# EAGLE board SatNOGSBoard (EAGLE 6.4)
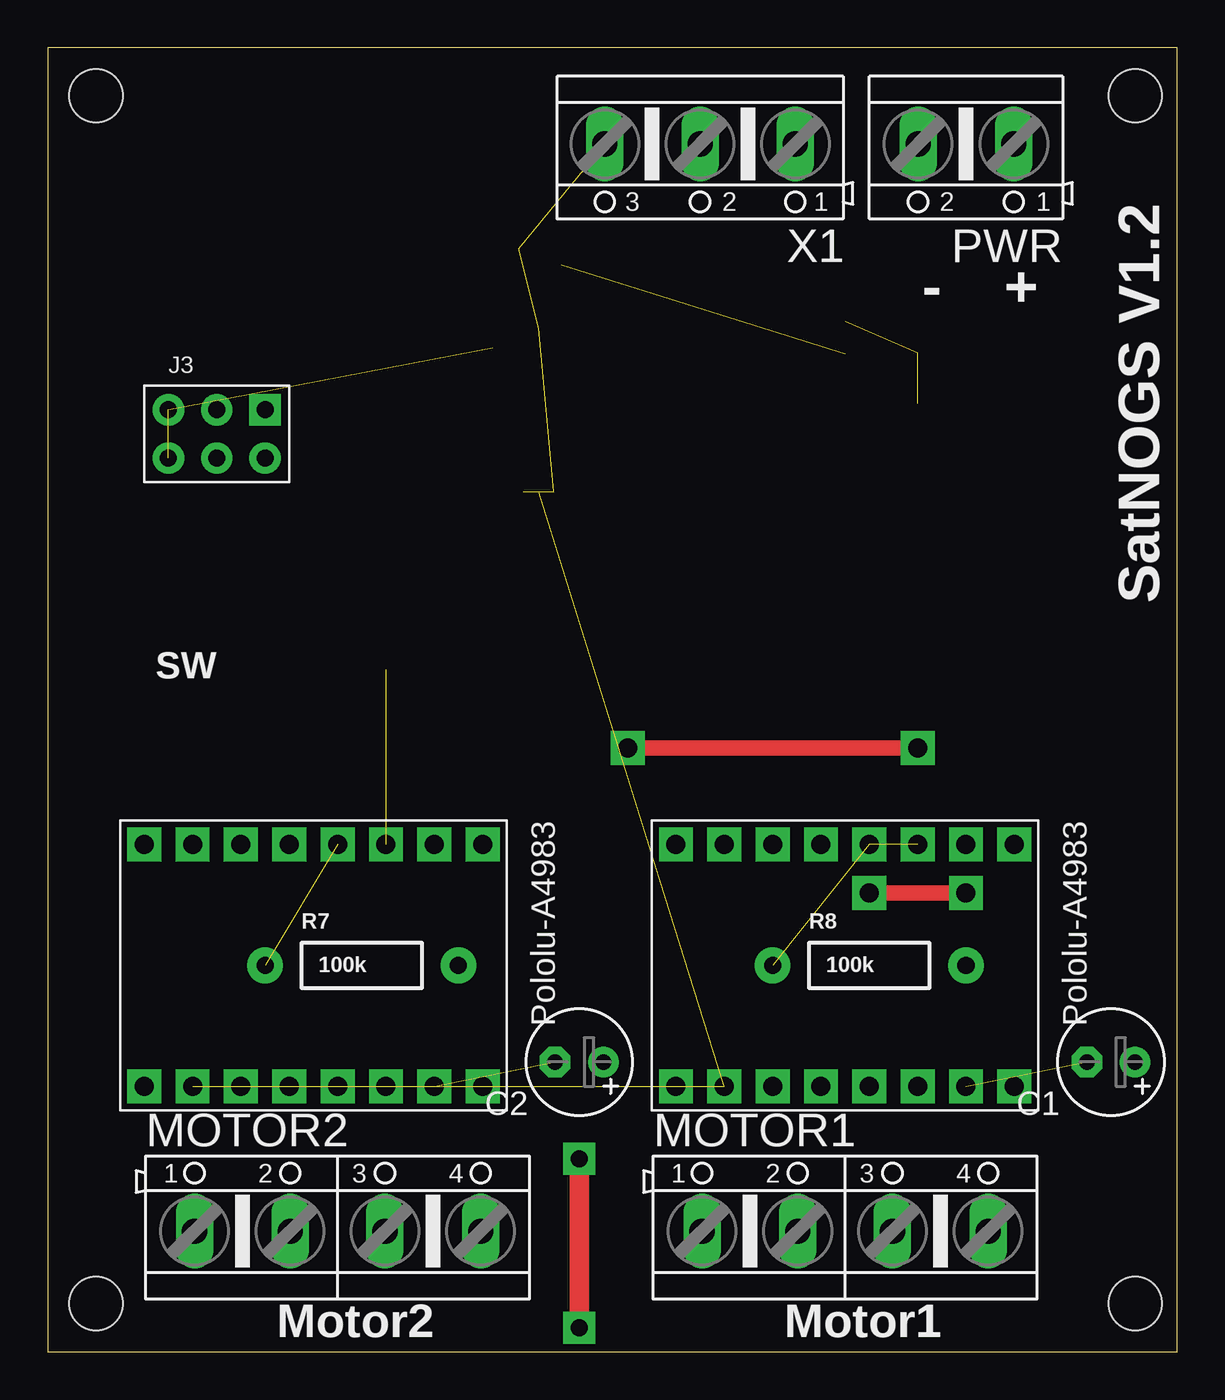
[diagram p0: board, top side]
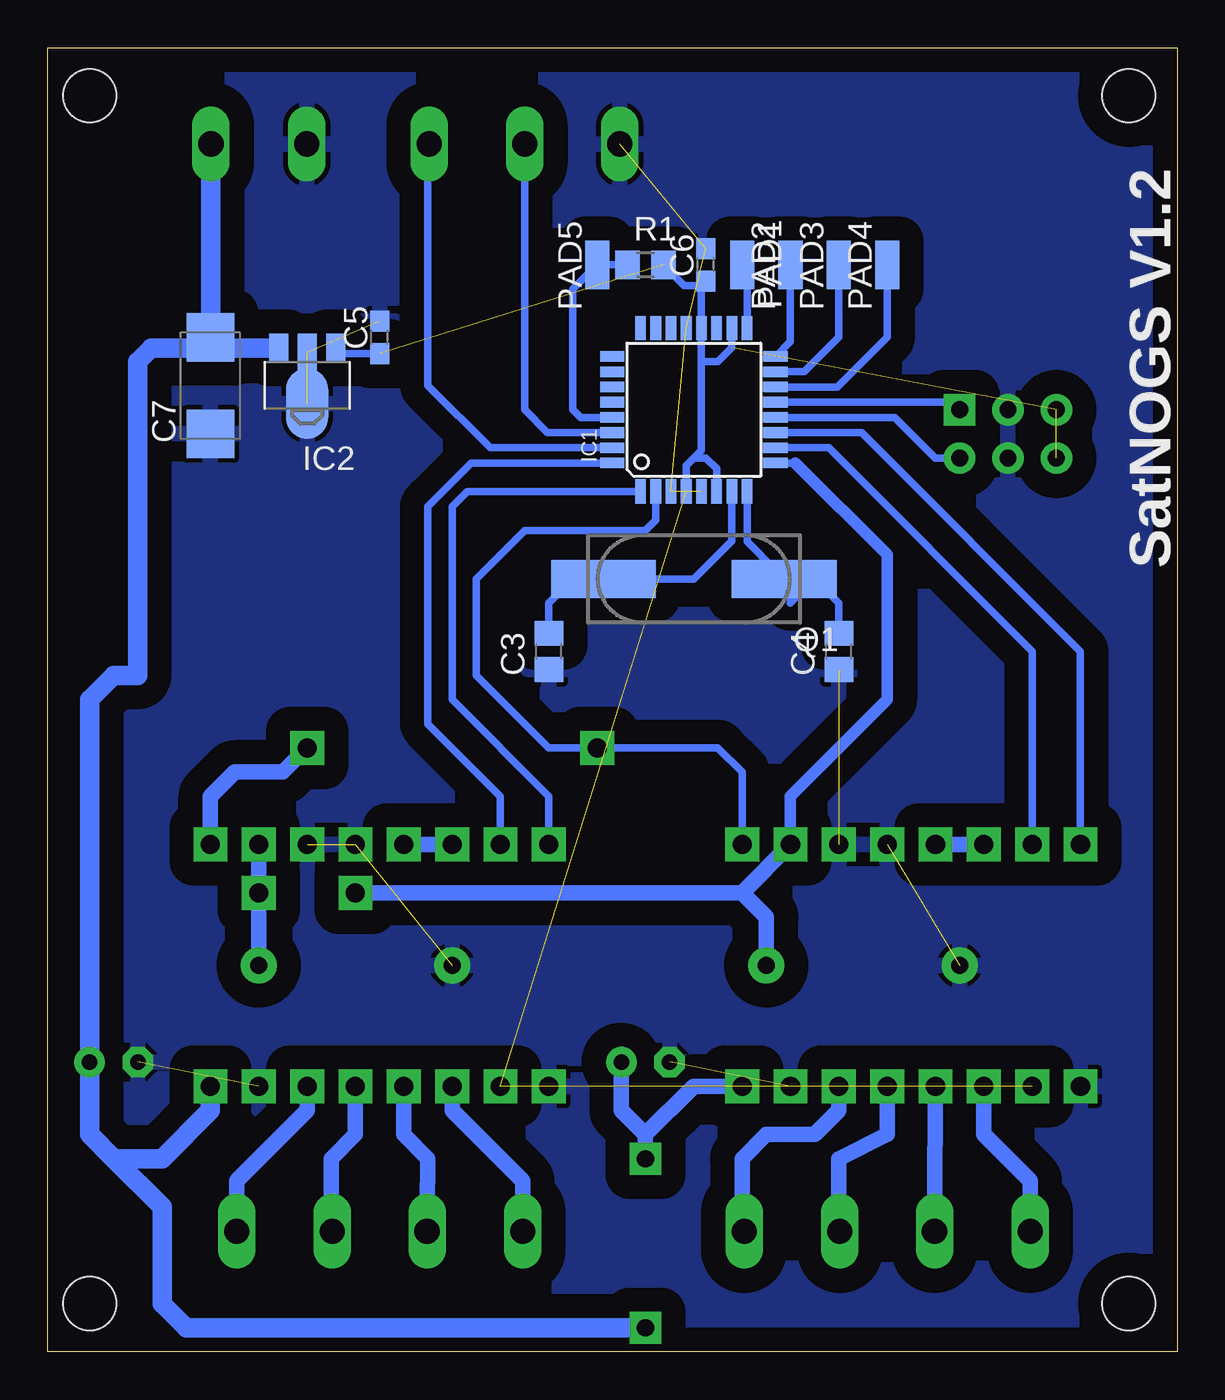
[diagram p1: board, bottom side, seen from below]

Size 59.36 x 68.57 mm. Coordinates in mm from the lower left corner, seen from the top.
Outline: 0,0 59.36,0 59.36,68.57 0,68.57 0,0
Copper layers (1*16): Top 0.035mm / dielectric 1.5mm / Bottom 0.035mm
Design rules "SparkFun": minimum track width 8mil, minimum drill 20mil, track to track 8mil, track to pad 8mil, pad to pad 8mil, via to via 8mil, smd to smd 8mil, copper to edge 8mil, drill to drill 8mil, minimum pad ring 12mil, minimum via ring 10mil, stop-mask expansion 4mil, vias tented up to drill 20mil, thermal gap 10mil
Holes 2.8 mm at 2.54,66.04 57.15,66.04 2.54,2.54 57.15,2.54

## Footprints (pad centres in the part's own frame; a part is rotated, then mirrored left to right if it is on the bottom)
E2,5-6 = drill 0.813 pad 1.6: + -1.27,0 | drill 0.813 pad 1.6 octagon: - 1.27,0
C0805 = smd 1.3 x 1.5: 1 -0.95,0; 2 0.95,0
C0603 = smd 1.1 x 1: 1 -0.85,0; 2 0.85,0
C/6032-28R = smd 2.55 x 2.5: + 2.525,0; - -2.525,0
POLOLU-A4983 = drill 1 pad 1.778 square: 1 -6.35,8.89; 2 -6.35,6.35; 3 -6.35,3.81; 4 -6.35,1.27; 5 -6.35,-1.27; 6 -6.35,-3.81; 7 -6.35,-6.35; 8 -6.35,-8.89; 9 6.35,-8.89; 10 6.35,-6.35; 11 6.35,-3.81; 12 6.35,-1.27; 13 6.35,1.27; 14 6.35,3.81; 15 6.35,6.35; 16 6.35,8.89
TQFP32-08 = smd 1.27 x 0.559: 1 -4.293,2.8; 2 -4.293,2; 3 -4.293,1.2; 4 -4.293,0.4; 5 -4.293,-0.4; 6 -4.293,-1.2; 7 -4.293,-2; 8 -4.293,-2.8; 17 4.293,-2.8; 18 4.293,-2; 19 4.293,-1.2; 20 4.293,-0.4; 21 4.293,0.4; 22 4.293,1.2; 23 4.293,2; 24 4.293,2.8 | smd 0.559 x 1.27: 9 -2.8,-4.293; 10 -2,-4.293; 11 -1.2,-4.293; 12 -0.4,-4.293; 13 0.4,-4.293; 14 1.2,-4.293; 15 2,-4.293; 16 2.8,-4.293; 25 2.8,4.293; 26 2,4.293; 27 1.2,4.293; 28 0.4,4.293; 29 -0.4,4.293; 30 -1.2,4.293; 31 -2,4.293; 32 -2.8,4.293
SOT89 = smd 1 x 1.5: 1 -1.499,-1.981; 3 1.499,-1.981 | smd 1 x 2: 2 0,-1.727 | smd 2.2 x 3.7: 2@1 0,0.94
2X3P-2.54-65/35MIL = drill 0.889 pad 1.651 square: 1 -1.27,2.54 | drill 0.889 pad 1.651: 2 -1.27,0; 3 -1.27,-2.54; 4 1.27,-2.54; 5 1.27,0; 6 1.27,2.54
AK500/4 = drill 1.321 long: 1 -7.518,0; 2 -2.489,0; 3 2.489,0; 4 7.518,0
SMD1,27-2,54 = smd 1.27 x 2.54: 1 0,0
AK500/2 = drill 1.321 long: 1 -2.515,0; 2 2.515,0
CSM-7X-DU = smd 5.5 x 2: 1 -4.75,0; 2 4.75,0
R0805 = smd 1.3 x 1.5: 1 -0.95,0; 2 0.95,0
AXIAL-0.4 = drill 0.9 pad 1.88: P$1 -5.08,0; P$2 5.08,0
AK500/3 = drill 1.321 long: 1 -5.004,0; 2 0,0; 3 5.004,0

## Placement (x,y rotation side)
C1  100uF  [E2,5-6]  55.88,15.24 180 top
C2  100uF  [E2,5-6]  27.94,15.24 180 top
C3  18p  [C0805]  33.02,36.83 90 bottom
C4  18p  [C0805]  17.78,36.83 90 bottom
C5  100n  [C0603]  41.91,53.34 90 bottom
C6  100n  [C0603]  24.77,57.15 90 bottom
C7  [C/6032-28R]  50.8,50.8 90 bottom
DRIVER1  POLOLU-A4983POLOLU-A4983  [POLOLU-A4983]  41.91,20.32 270 top
DRIVER2  POLOLU-A4983POLOLU-A4983  [POLOLU-A4983]  13.97,20.32 270 top
IC1  MEGA8-AI  [TQFP32-08]  25.4,49.53 90 bottom
IC2  78L05F  [SOT89]  45.72,50.8 180 bottom
J3  4  [2X3P-2.54-65/35MIL]  8.89,48.26 270 top
MOTOR1  2  [AK500/4]  41.91,6.35 0 top
MOTOR2  3  [AK500/4]  15.24,6.35 0 top
PAD1  [SMD1,27-2,54]  22.86,57.15 180 bottom
PAD2  [SMD1,27-2,54]  20.32,57.15 0 bottom
PAD3  [SMD1,27-2,54]  17.78,57.15 0 bottom
PAD4  [SMD1,27-2,54]  15.24,57.15 0 bottom
PAD5  [SMD1,27-2,54]  30.48,57.15 0 bottom
PWR  1  [AK500/2]  48.26,63.5 180 top
Q1  16MHz  [CSM-7X-DU]  25.4,40.64 180 bottom
R1  10k  [R0805]  27.94,57.15 0 bottom
R7  100k  [AXIAL-0.4]  16.51,20.32 0 top
R8  100k  [AXIAL-0.4]  43.18,20.32 0 top
X1  [AK500/3]  34.29,63.5 180 top

## Library data of the parts
C1-C7 R1 = rcl
DRIVER1 DRIVER2 = Pololu-A4983
IC1 = atmel; MPN: ATMEGA8-16AU; OC_FARNELL: 9171371; OC_NEWARK: 73M8863
IC2 = linear
J3 = Connector
MOTOR1 MOTOR2 PWR X1 = con-ptr500; OC_FARNELL: unknown; OC_NEWARK: unknown
PAD1-PAD5 = wirepad
Q1 = crystal; OC_FARNELL: unknown; OC_NEWARK: unknown
R7 R8 = SparkFun-Resistors

## Nets
1-1A: DRIVER1.12 MOTOR1.2
1-1B: DRIVER1.11 MOTOR1.1
1-2A: DRIVER1.13 MOTOR1.3
1-2B: DRIVER1.14 MOTOR1.4
2-1A: DRIVER2.12 MOTOR2.2
2-1B: DRIVER2.11 MOTOR2.1
2-2A: DRIVER2.13 MOTOR2.3
2-2B: DRIVER2.14 MOTOR2.4
+5V: C5.1 C6.1 DRIVER1.10 DRIVER2.10 IC1.4 IC1.6 IC1.18 IC1.20 IC2.1 J3.3 J3.4 R1.2
DIR-1: DRIVER1.8 IC1.1
DIR-2: DRIVER2.8 IC1.11
GND: C1.- C2.- C3.1 C4.1 C5.2 C6.2 C7.- DRIVER1.3 DRIVER1.4 DRIVER1.9 DRIVER1.15 DRIVER2.3 DRIVER2.4 DRIVER2.9 DRIVER2.15 IC1.3 IC1.5 IC1.21 IC2.2 IC2.2@1 J3.2 J3.5 PWR.2 R7.P$1 R8.P$1 X1.3
M_EN: DRIVER1.1 DRIVER2.1 IC1.2
MS1: DRIVER1.2 DRIVER2.2 IC1.9 R7.P$2 R8.P$2
N$1: DRIVER1.5 DRIVER1.6
N$2: DRIVER2.5 DRIVER2.6
N$3: IC1.31 X1.1
N$4: C3.2 IC1.7 Q1.2
N$5: IC1.29 PAD5.1 R1.1
N$6: C4.2 IC1.8 Q1.1
N$7: IC1.30 X1.2
N$8: IC1.14 PAD4.1
N$9: IC1.15 PAD3.1
N$10: IC1.16 PAD2.1
N$11: IC1.17 PAD1.1
STEP-1: DRIVER1.7 IC1.32
STEP-2: DRIVER2.7 IC1.10
SW1: IC1.13 J3.1
SW2: IC1.12 J3.6
VMOTOR: C1.+ C2.+ C7.+ DRIVER1.16 DRIVER2.16 IC2.3 PWR.1

## Tracks (layer width: path | path; a pad name or v marks a point on that pad's centre or on a via)
1-1A
  Bottom 0.813: MOTOR1.2 39.42,8.84 39.37,8.89 39.37,10.16 40.64,11.43 DRIVER1.12
1-1B
  Bottom 0.813: MOTOR1.1 34.39,8.99 38.1,12.7 DRIVER1.11
1-2A
  Bottom 0.813: DRIVER1.13 43.18,11.43 44.45,10.16 44.45,6.4 MOTOR1.3
1-2B
  Bottom 0.813: MOTOR1.4 49.43,8.99 45.72,12.7 DRIVER1.14
2-1A
  Bottom 0.813: MOTOR2.2 12.75,10.21 12.7,11.43 DRIVER2.12
2-1B
  Bottom 0.813: MOTOR2.1 7.72,8.99 10.16,11.43 DRIVER2.11
2-2A
  Bottom 0.813: DRIVER2.13 15.24,11.43 17.78,10.16 17.78,6.4 MOTOR2.3
2-2B
  Bottom 0.813: MOTOR2.4 22.86,6.45 22.86,10.16 21.59,11.43 19.05,11.43 17.78,12.7 DRIVER2.14
+5V  (5 unrouted)
  Bottom 0.406: IC1.4 25.8,46.59 25.4,46.99 | IC1.6 24.2,46.42 24.77,46.99 25.4,46.99 | 25,52.07 IC1.20 25,56.06 | 25,52.07 25,47.39 25.4,46.99 | IC1.18 23.4,52.8 24.13,52.07 25,52.07 | 25,56.06 C6.1 | 25,56.06 25.91,56.06 R1.2 | C5.1 43.93,52.49 IC2.1
DIR-1
  Bottom 0.406: IC1.1 37.31,45.24 38.1,44.45 38.1,34.29 33.02,29.21 DRIVER1.8
DIR-2
  Bottom 0.406: IC1.11 16.58,48.33 5.08,36.83 DRIVER2.8
GND  (12 unrouted)
  pour Bottom (isolate 1.27): 0,68.58 0,0 59.69,0 59.69,68.58
M_EN  (via drill 1 pad 1.78)
  Top 0.813: v45.72,31.75 v30.48,31.75
  Bottom 0.406: IC1.2 27.4,43.72 27.94,43.18 34.29,43.18 36.83,40.64 36.83,35.56 33.02,31.75 v30.48,31.75 24.13,31.75 22.86,30.48 DRIVER2.1
  Bottom 0.813: DRIVER1.1 50.8,29.21 49.53,30.48 46.99,30.48 v45.72,31.75
MS1  (via drill 1 pad 1.78)
  Top 0.813: v43.18,24.13 v48.26,24.13
  Bottom 0.406: IC1.9 20.06,46.73
  Bottom 0.61: DRIVER2.2 20.32,29.21 19.05,30.48 15.24,34.29 15.24,41.91 20.06,46.73
  Bottom 0.813: R8.P$2 v48.26,24.13 DRIVER1.2 | DRIVER2.2 22.86,24.13 | R7.P$2 21.59,22.86 22.86,24.13 | v43.18,24.13 22.86,24.13
N$1
  Bottom 0.813: DRIVER1.6 DRIVER1.5
N$2
  Bottom 0.813: DRIVER2.6 DRIVER2.5
N$3
  Bottom 0.406: IC1.31 36.1,47.53 39.37,50.8 39.37,63.42 X1.1
N$4
  Bottom 0.406: IC1.7 23.4,42.64 25.4,40.64 Q1.2 31.75,40.64 33.02,39.37 C3.2
N$5
  Bottom 0.406: R1.1 PAD5.1 31.75,55.88 31.75,49.53 31.35,49.13 IC1.29
N$6
  Bottom 0.406: IC1.8 22.6,42.59 21.12,41.11 Q1.1 20.32,40.31 20.32,39.37 19.05,40.64 17.78,39.37 C4.2
N$7
  Bottom 0.406: IC1.30 33.09,48.33 34.29,49.53 X1.2
N$8
  Bottom 0.406: IC1.14 17.85,50.73 15.24,53.34 PAD4.1
N$9
  Bottom 0.406: IC1.15 19.59,51.53 17.78,53.34 PAD3.1
N$10
  Bottom 0.406: PAD2.1 20.32,53.12 IC1.16
N$11
  Bottom 0.406: IC1.17 22.6,56.89 PAD1.1
STEP-1
  Bottom 0.406: IC1.32 37.09,46.73 39.37,44.45 39.37,33.02 35.56,29.21 DRIVER1.7
STEP-2
  Bottom 0.406: IC1.10 18.32,47.53 7.62,36.83 DRIVER2.7
SW1
  Bottom 0.406: IC1.13 11.83,49.93 J3.1
SW2
  Bottom 0.406: IC1.12 14.84,49.13 12.7,46.99 J3.6
VMOTOR  (via drill 0.9 pad 1.68)
  Top 1.016: v27.94,10.16 v27.94,1.27
  Bottom 0.406: IC2.3 50.26,52.78 C7.+
  Bottom 0.813: C2.+ 29.21,12.7 27.94,11.43 | 27.94,11.43 v27.94,10.16 | DRIVER2.16 25.4,13.97 27.94,11.43
  Bottom 1.016: DRIVER1.16 50.8,12.7 53.34,10.16 55.88,10.16 | 55.88,10.16 57.15,11.43 C1.+ 57.15,34.29 55.88,35.56 54.61,35.56 54.61,52.07 53.9,52.78 IC2.3 | v27.94,1.27 52.07,1.27 53.34,2.54 53.34,7.62 55.88,10.16 | PWR.1 50.77,53.35
  Bottom 1.27: 50.77,53.35 C7.+

## Text on the board
tPlace: - | + | SatNOGS V1.2 | SW | Motor2 | Motor1
bPlace: SatNOGS V1.2